# EAGLE board panel-front (EAGLE 7.7.0)
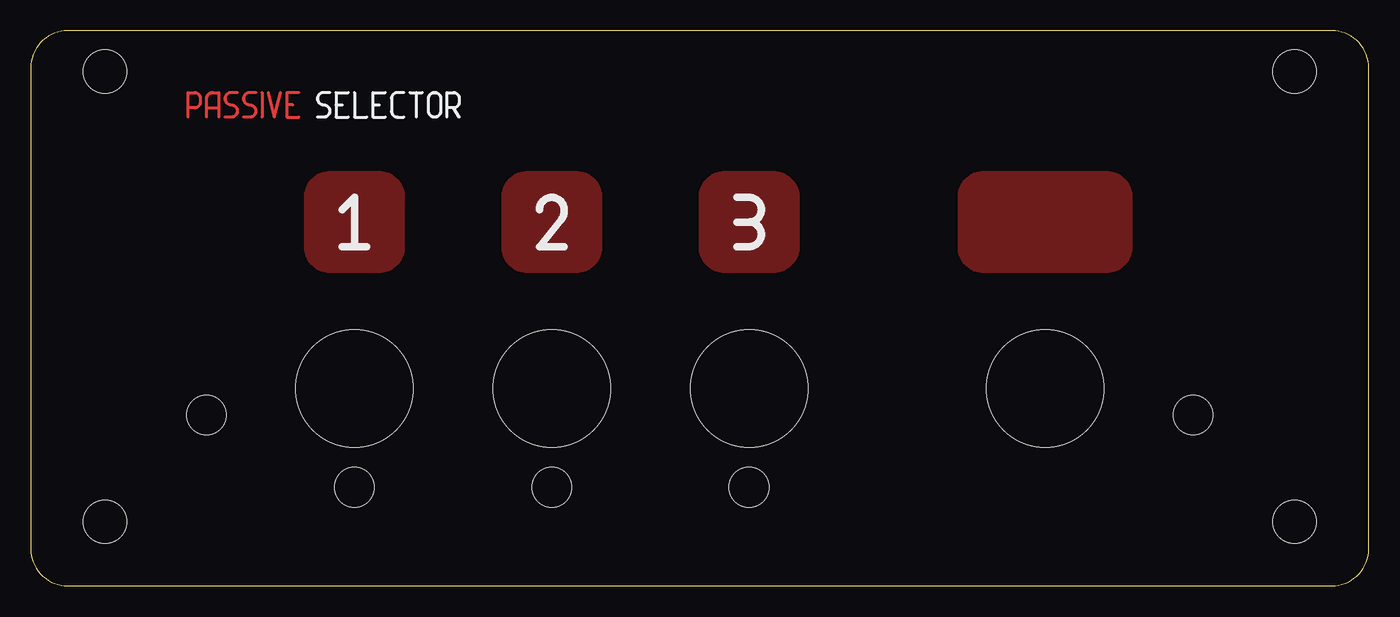
[diagram p0: board, top side]
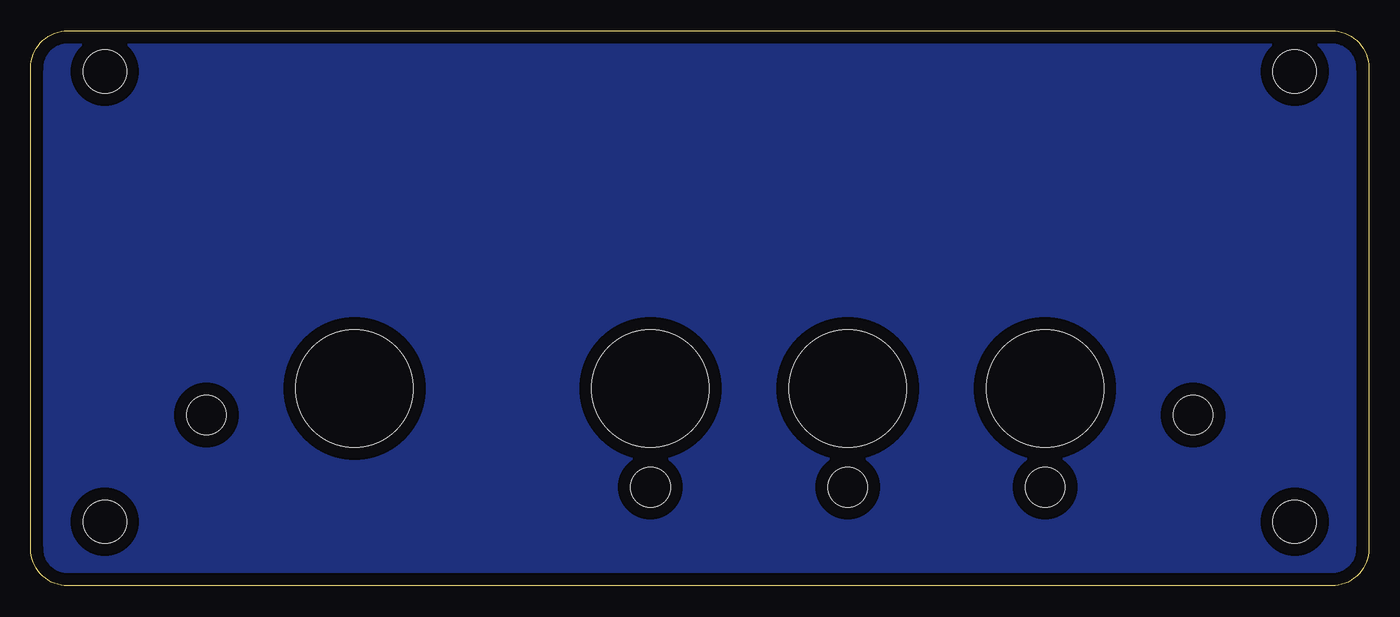
[diagram p1: board, bottom side, seen from below]

Size 108.5 x 45 mm. Coordinates in mm from the lower left corner, seen from the top.
Copper layers (1*16): Top 0.035mm / dielectric 1.5mm / Bottom 0.035mm
Design rules "default": minimum track width 10mil, minimum drill 24mil, track to track 8mil, track to pad 8mil, pad to pad 8mil, via to via 8mil, smd to smd 8mil, copper to edge 40mil, drill to drill 8mil, minimum pad ring 10mil, minimum via ring 8mil, stop-mask expansion 4mil, vias tented up to drill 0mil, thermal gap 10mil

## Footprints (pad centres in the part's own frame; a part is rotated, then mirrored left to right if it is on the bottom)
B3-SECTION = hole 3.5: 1.75,5.2; 98.25,5.2; 98.25,41.7; 1.75,41.7
PANEL-9MM-BUTTON-SPUN = hole 9.5: 0,6.5
LED-3MM = hole 3.2: 0,0
PANEL-KEYSTONE-7762 = hole 3.2: 0,4.365

## Placement (x,y rotation side)
E$1  [B3-SECTION]  4.25,0 0 top
E$2  [PANEL-9MM-BUTTON-SPUN]  26.25,9.5 0 top
E$3  [PANEL-9MM-BUTTON-SPUN]  42.25,9.5 0 top
E$4  [PANEL-9MM-BUTTON-SPUN]  58.25,9.5 0 top
E$5  [PANEL-9MM-BUTTON-SPUN]  82.25,9.5 0 top
E$6  [LED-3MM]  26.25,8 0 top
E$7  [LED-3MM]  42.25,8 0 top
E$8  [LED-3MM]  58.25,8 0 top
E$9  [PANEL-KEYSTONE-7762]  14.25,9.5 0 top
E$10  [PANEL-KEYSTONE-7762]  94.25,9.5 0 top

## Library data of the parts
E$1-E$10 = enclosure

## Tracks (layer width: path | path; a pad name or v marks a point on that pad's centre or on a via)
S$1
  pour Top: 22.25,31.5 22.25,27.5 arc90 24.25,25.5 28.25,25.5 arc90 30.25,27.5 30.25,31.5 arc90 28.25,33.5 24.25,33.5 arc90
S$2
  Top 0.254: 12.75,38 12.75,38.75 | 12.75,38.75 12.75,40 13.25,40 arc-90 13.75,39.5 13.75,39.25 arc-90 13.25,38.75 12.75,38.75
S$3
  Top 0.254: 14.25,38 14.25,38.75 | 14.25,38.75 14.25,39.5 arc-90 14.75,40 15.25,40 15.25,38.75 | 15.25,38.75 15.25,38 | 14.25,38.75 15.25,38.75
S$4
  Top 0.254: 16.75,40 16.25,40 arc90 15.75,39.5 arc90 16.25,39 arc-90 16.75,38.5 arc-90 16.25,38 15.75,38
S$5
  Top 0.254: 18.25,40 17.75,40 arc90 17.25,39.5 arc90 17.75,39 arc-90 18.25,38.5 arc-90 17.75,38 17.25,38
S$6
  Top 0.254: 18.75,40 18.75,38
S$7
  Top 0.254: 19.25,40 19.75,38 20.25,40
S$8
  Top 0.254: 21.75,40 20.75,40 20.75,39 | 20.75,39 20.75,38 21.75,38 | 21.25,39 20.75,39
S$9
  pour Top: 38.25,31.5 38.25,27.5 arc90 40.25,25.5 44.25,25.5 arc90 46.25,27.5 46.25,31.5 arc90 44.25,33.5 40.25,33.5 arc90
S$10
  pour Top: 54.25,31.5 54.25,27.5 arc90 56.25,25.5 60.25,25.5 arc90 62.25,27.5 62.25,31.5 arc90 60.25,33.5 56.25,33.5 arc90
S$11
  pour Top: 75.25,31.5 75.25,27.5 arc90 77.25,25.5 87.25,25.5 arc90 89.25,27.5 89.25,31.5 arc90 87.25,33.5 77.25,33.5 arc90
S$12
  pour Bottom: 0.25,45 108.25,45 108.25,0 0.25,0